# Altium PCB 固定翼.PcbDoc
Units mil, origin at the board's own origin, x right, y up, seen from the top; angles counter-clockwise.
Board outline 2120.03 x 1290.08 mil, 2 copper layers (Top Layer, Bottom Layer); 67 components, 57 nets, 316 pads, 63 vias.
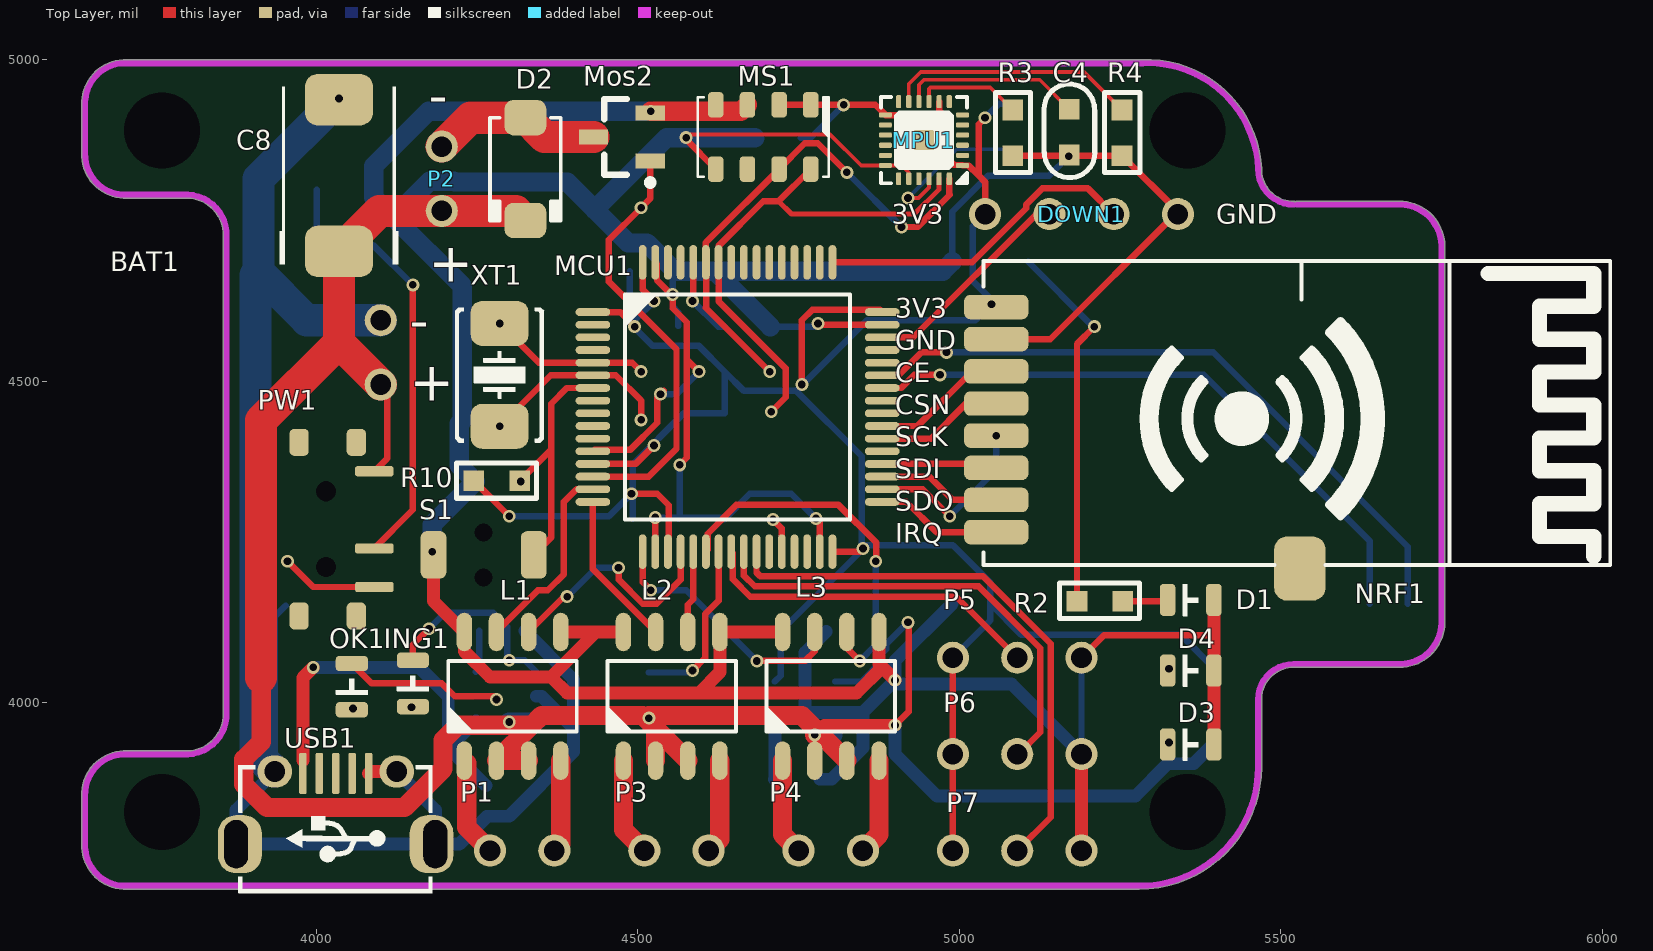
[diagram p0: Top Layer view]
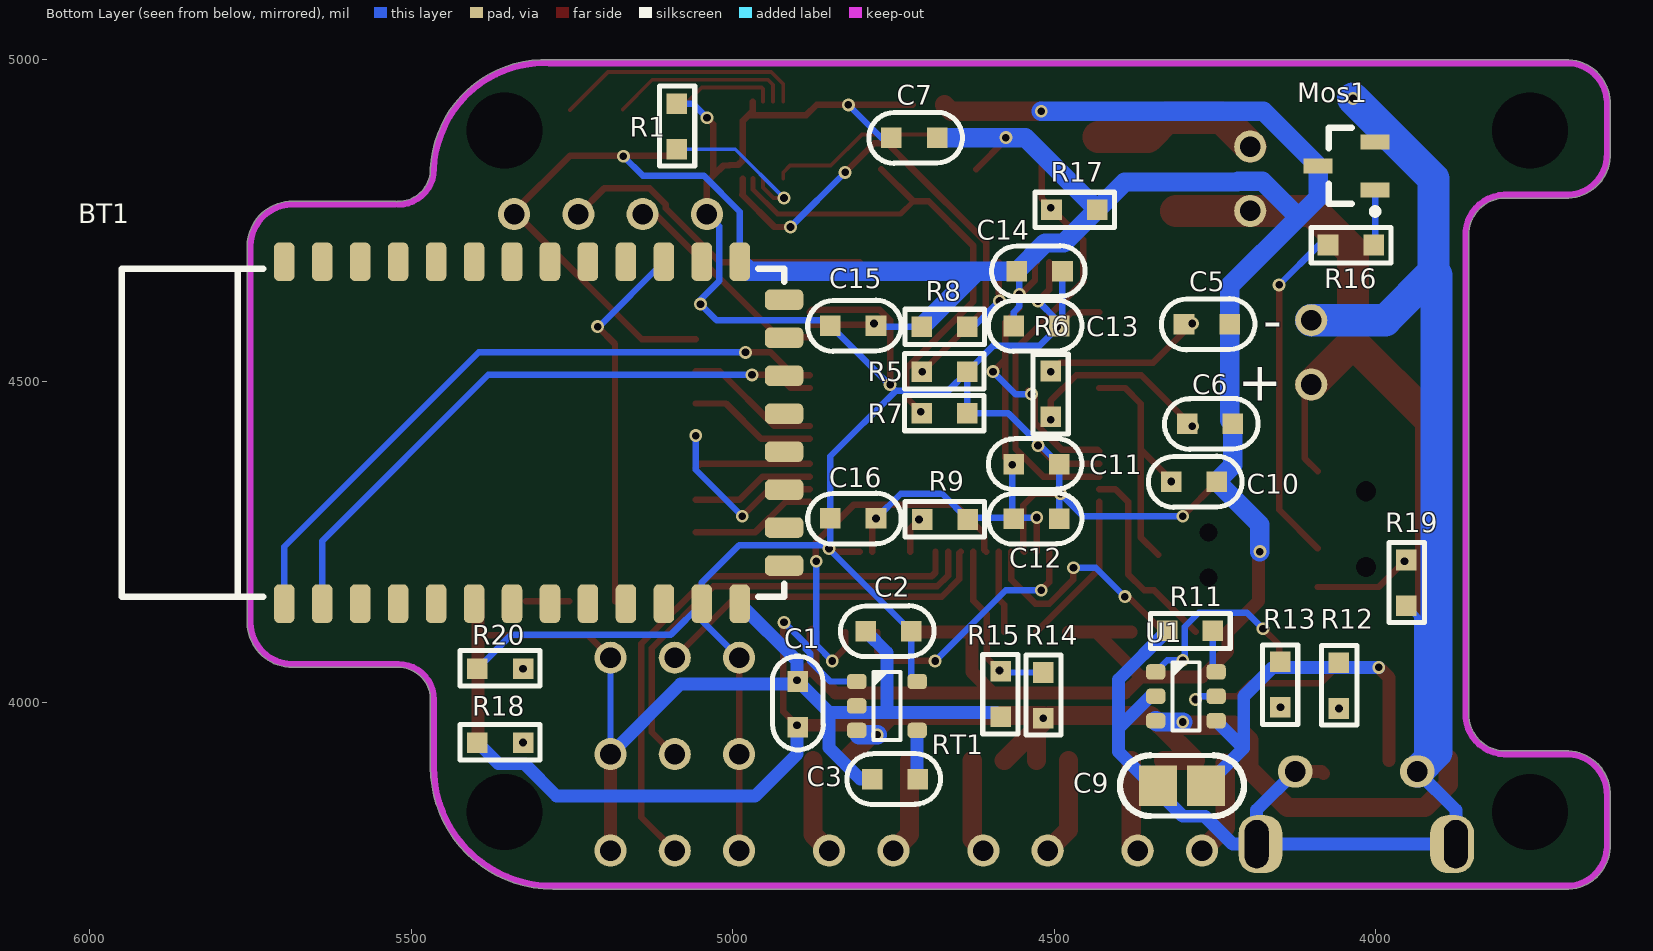
[diagram p1: Bottom Layer view, seen from below]
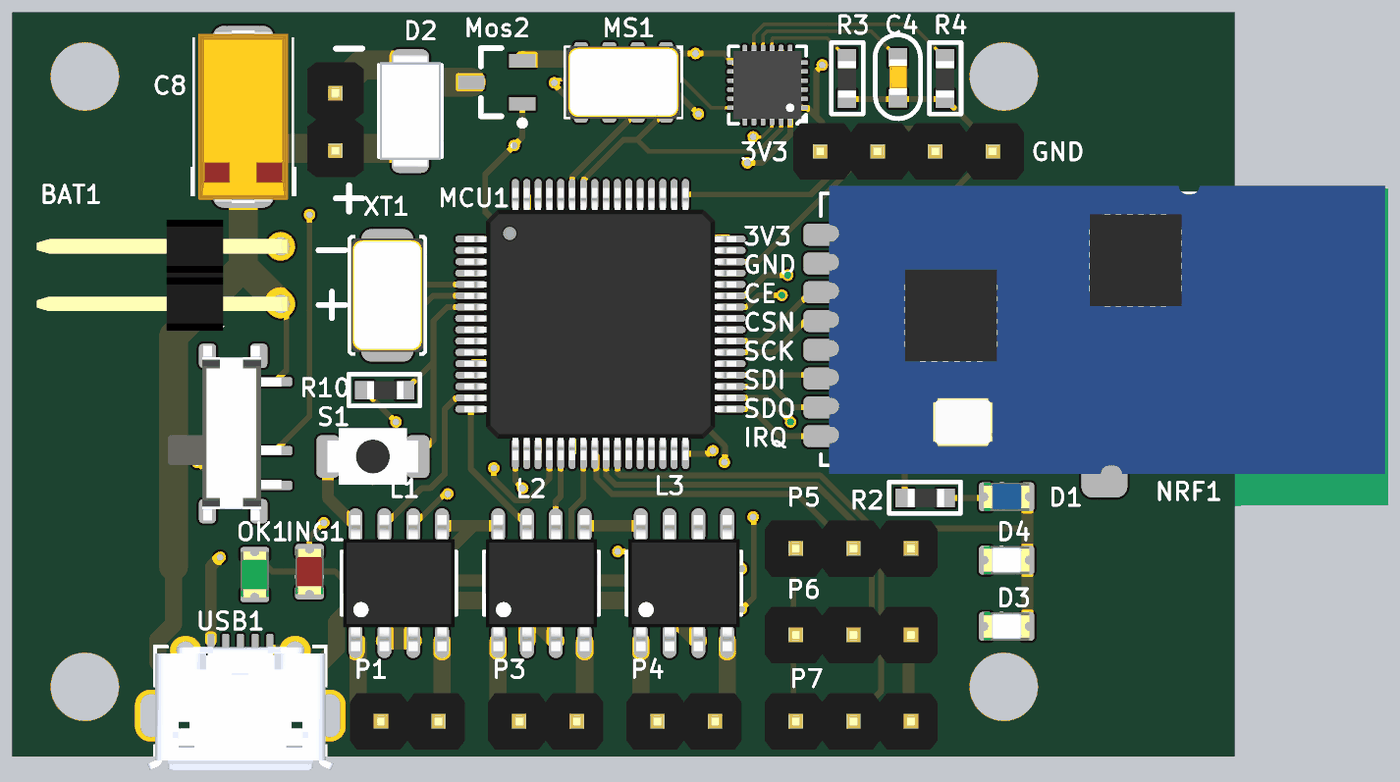
[diagram p2: 3D render of the assembled board from above, using the file's embedded part models]
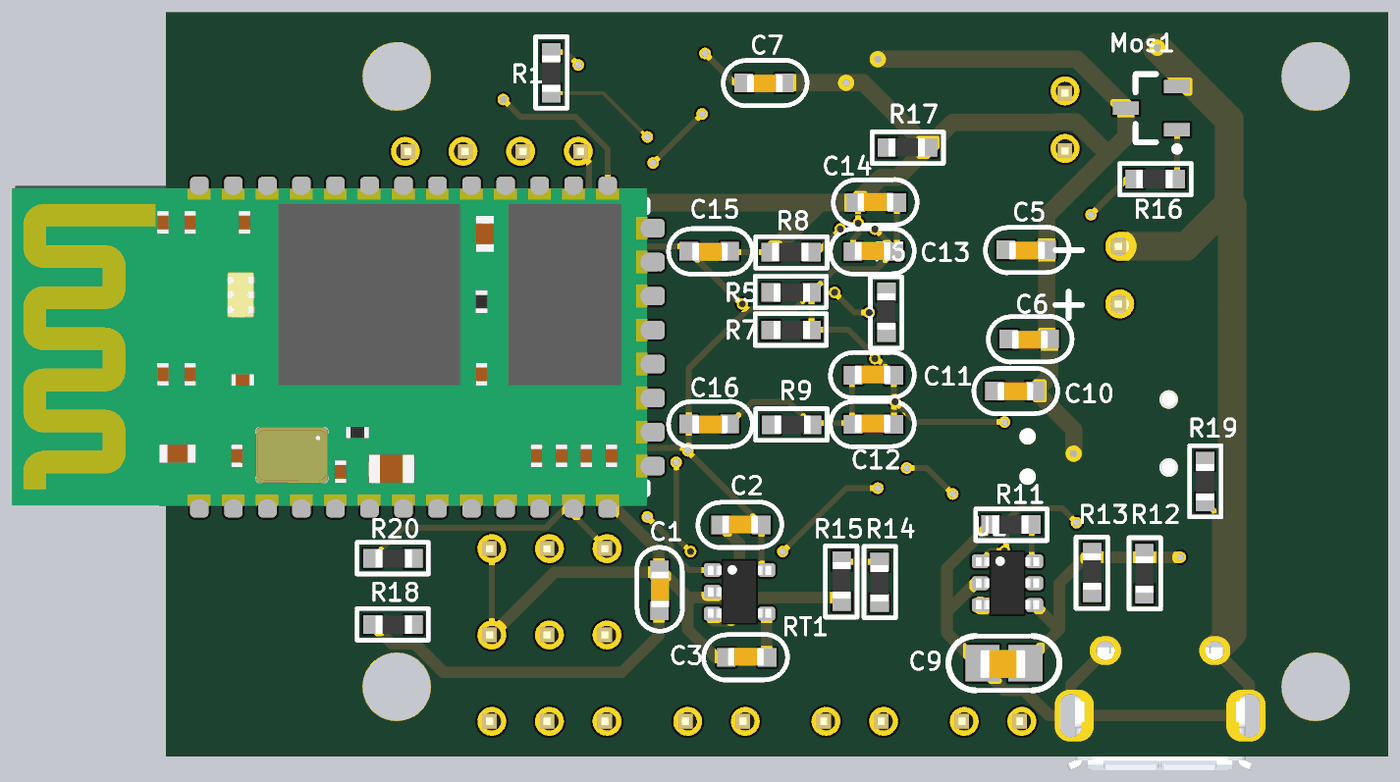
[diagram p3: 3D render of the assembled board from below, using the file's embedded part models]

## Layer stack, top to bottom
Top Layer: signal copper 1.4
Dielectric: dielectric 12.6, FR-4, Dk 4.8
Bottom Layer: signal copper 1.4

## Board outline
3634.99,3774.8 cw(c3640,3775) 3634.99,3775 3634.99,3854.9 cw(c3702.5,3857.5) 3699.8,3925.01 cw(c3700,3920) 3700,3925.01 3799.9,3925.01 ccw(c3797.5,3982.5) 3855.03,3982.5 ccw(c3797.5,3982.5) 3854.99,3984.77 ccw(c3797.5,3982.5) 3854.99,3984.8 3854.99,3984.77 cw(c3860,3985) 3854.99,3985 3854.99,4725 cw(c3860,4725) 3854.99,4725.23 ccw(c3797.5,4727.5) 3855.03,4727.5 ccw(c3797.5,4727.5) 3799.9,4784.98 3700,4784.98 cw(c3700,4790) 3699.8,4784.99 cw(c3702.5,4852.5) 3634.99,4855.1 3634.99,4935 cw(c3640,4935) 3634.99,4935.2 cw(c3702.5,4932.5) 3705.1,5000.02 5284.89,5000.02 cw(c5292.5,4822.5) 5470.01,4830.22 cw(c5465,4830) 5470.02,4830 ccw(c5520,4830) 5520,4780.02 cw(c5520,4775) 5522.5,4779.35 cw(c5525,4775) 5525,4780.02 5685,4780.02 ccw(c5685,4775) 5684.97,4780.02 5685,4780.02 cw(c5685,4710) 5755.02,4710 5755.02,4125 ccw(c5750,4125) 5755.02,4125.03 5755.02,4125 cw(c5685,4125) 5685,4054.99 5520,4054.99 ccw(c5520,4005) 5470.02,4005 5470.02,3900 cw(c5465,3900) 5470.01,3899.97 ccw(c5280,3900) 5470.01,3900 5470.01,3899.97 cw(c5280,3900) 5280,3709.99 3705.1,3709.99 cw(c3702.5,3777.5)

## Design rules (kind name [scope] priority, off if disabled: settings)
Clearance [All] p1: gap=6
PolygonConnect [All] p1: connectstyle=Relief reliefconductorwidth=10 reliefentries=4 polygonreliefangle="90 Angle" airgapwidth=10
RoutingVias [All] p1: holewidth=28 width=50 viastyle="Through Hole" minholewidth=28 minwidth=50 maxholewidth=28 maxwidth=50
SolderMaskExpansion [All] p1: expansion=4
Width [All] p1: maxlimit=100 minlimit=6 preferedwidth=10 minimp=50.000000 maximp=50.000000 favimp=50.000000
28 further rules are at their usual default settings.

## Classes and differential pairs
component class 接口: BAT1 D2 D3 D4 DOWN1 L1 L2 L3 Mos1 Mos2 P1 P2 P3 P4 P5 P6 P7 PW1 R16 R17 R18 R19 R20 USB1
component class 固定翼: BT1 C1 C2 C3 C4 C5 C6 C7 C8 C9 C10 C11 C12 C13 C14 C15 C16 D1 ING1 MCU1 MPU1 MS1 NRF1 OK1 R1 R2 R3 R4 R5 R6 R7 R8 R9 R10 R11 R12 R13 R14 R15 RT1 S1 U1 XT1

## Components (designator, comment, footprint, x,y, rotation, side; value= is the part's Value field where it differs from the comment)
BAT1 "HDR1x2_2.54" HDR1X2_2.54_90 4100,4495 r180 top
BT1 "Bluetooth_HC05" Bluetooth_HC05 4920,4420 r90 bottom
C1 "Cap_0603" CAP_0603 4900,4000 r270 bottom
C2 "Cap_0603" CAP_0603 4760,4110 r180 bottom
C3 "Cap_0603" CAP_0603 4750,3880 r180 bottom
C4 "Cap_0603" CAP_0603 5170,4890 r270 top
C5 "Cap_0603" CAP_0603 4260,4590 r0 bottom
C6 "Cap_0603" CAP_0603 4255,4435 r0 bottom
C7 "Cap_0603" CAP_0603 4715,4880 r0 bottom
C8 "Cap_Tan_2917" CAP_TAN_D2917 4035,4820 r90 top
C9 "Cap_0805" CAP_0805 4300,3870 r180 bottom
C10 "Cap_0603" CAP_0603 4280,4345 r0 bottom
C11 "Cap_0603" CAP_0603 4530,4370 r180 bottom
C12 "Cap_0603" CAP_0603 4530,4285 r180 bottom
C13 "Cap_0603" CAP_0603 4530,4585 r180 bottom
C14 "Cap_0603" CAP_0603 4525,4670 r180 bottom
C15 "Cap_0603" CAP_0603 4810,4587.63 r0 bottom
C16 "Cap_0603" CAP_0603 4810,4287.63 r0 bottom
D1 "LED_0805" LED_0805_BLUE 5360,4160 r0 top
D2 "Diode_SMA" DO-214AC 4325,4830 r270 top
D3 "LED_0805" LED_0805_YELLOW 5360,3935 r0 top
D4 "LED_0805" LED_0805_YELLOW 5360,4050 r0 top
DOWN1 "HDR1x4_2.54" HDR1X4_2.54_180 5040,4760 r90 top
ING1 "LED_0805" LED_0805_RED 4150,4030 r90 top
L1 "L9110" SOP_E150_8 4305,4010 r90 top
L2 "L9110" SOP_E150_8 4552.5,4010 r90 top
L3 "L9110" SOP_E150_8 4800,4010 r90 top
MCU1 "STM32F103RC" LQFP_P0.5_64 4655,4460 r0 top
Mos1 "MOSFET N" Nmos_SOT23 4045,4835 r0 bottom
Mos2 "MOSFET N" Nmos_SOT23 4475,4880 r180 top
MPU1 "MPU9250" QFN_P0.4_24 4945,4875 r180 top
MS1 "MS5611" OTHER_MS5611_8 4695,4880 r270 top
NRF1 "NRF2401_优信" nrf24l01_youxin 5435,4435 r0 top
OK1 "LED_0805" LED_0805_GREEN 4055,4025 r90 top
P1 "HDR1x2_2.54" HDR1X2_2.54_180 4370,3770 r270 top
P2 "HDR1x2_2.54" HDR1X2_2.54_180 4195,4765 r180 top
P3 "HDR1x2_2.54" HDR1X2_2.54_180 4610,3770 r270 top
P4 "HDR1x2_2.54" HDR1X2_2.54_180 4850,3770 r270 top
P5 "HDR1x3_2.54" HDR1X3_2.54_180 4990,4070 r90 top
P6 "HDR1x3_2.54" HDR1X3_2.54_180 4990,3920 r90 top
P7 "HDR1x3_2.54" HDR1X3_2.54_180 4990,3770 r90 top
PW1 "SwitchSPDT_2.8x6.6_90" SwitchSPDT_2.8X6.6_90 4015,4270 r270 top
R1 "Res_0603" RES_0603 5005,4895 r270 bottom
R2 "Res_0603" RES_0603 5220,4240 r0 top
R3 "Res_0603" RES_0603 5165,4885 r270 top
R4 "Res_0603" RES_0603 5335,4885 r270 top
R5 "Res_0603" RES_0603 4669,4597 r180 bottom
R6 "Res_0603" RES_0603 4587,4482 r90 bottom
R7 "Res_0603" RES_0603 4669,4532 r180 bottom
R8 "Res_0603" RES_0603 4672,4503 r0 bottom
R9 "Res_0603" RES_0603 4668,4367 r180 bottom
R10 "Res_0603" RES_0603 4282,4427 r0 top
R11 "Res_0603" RES_0603 4290,4030 r0 bottom
R12 "Res_0603" RES_0603 3975,4025 r270 bottom
R13 "Res_0603" RES_0603 4230,4030 r90 bottom
R14 "Res_0603" RES_0603 4435,4010 r270 bottom
R15 "Res_0603" RES_0603 4665,4015 r90 bottom
R16 "Res_0603" RES_0603 4040,4630 r0 bottom
R17 "Res_0603" RES_0603 4470,4685 r0 bottom
R18 "Res_0603" RES_0603 5360,4020 r180 bottom
R19 "Res_0603" RES_0603 3870,4185 r270 bottom
R20 "Res_0603" RES_0603 5360,4135 r180 bottom
RT1 "RT9193" SOT23-5 4760,3995 r180 bottom
S1 "ButtonTACT_3x4x2_180" ButtonTACT_3x4x2_180H 4260,4230 r180 top
U1 "TP4059" SOT23-6 4295,4010 r180 bottom
USB1 "USB_Micro" USB_Micro-AB 4030,3790 r180 top
XT1 "XTAL_5032_2P" XT_5032_2 4285,4510 r90 top

## Footprints (in the part's own frame and the unit in brackets; to place one, negate y for a bottom-side part, rotate by r counter-clockwise, add the part's x,y. Pads: shape width x height; smd on the part's side, far side on the other; paste and mask are expansions set on the pad)
Bluetooth_HC05 [mil]
  rrect50% 60x32 smd: 1(-265.91,777.56) 2(-265.91,718.5) 3(-265.91,659.45) 4(-265.91,600.39) 5(-265.91,541.34) 6(-265.91,482.28) 7(-265.91,423.23) 8(-265.91,364.17) 9(-265.91,305.12) 10(-265.91,246.06) 11(-265.91,187.01) 12(-265.91,127.95) 13(-265.91,68.9) 22(265.91,68.9) 23(265.91,127.95) 24(265.91,187.01) 25(265.91,246.06) 26(265.91,305.12) 27(265.91,364.17) 28(265.91,423.23) 29(265.91,482.28) 30(265.91,541.34) 31(265.91,600.39) 32(265.91,659.45) 33(265.91,718.5) 34(265.91,777.56)
  rrect50% 32x60 smd: 14(-206.69,0) 15(-147.64,0) 16(-88.58,0) 17(-29.53,0) 18(29.53,0) 19(88.58,0) 20(147.64,0) 21(206.69,0)
  silkscreen extent -255,0 255,1030, body extent -276,0 276,1103, height 93
ButtonTACT_3x4x2_180H [mil]
  round 0 hole 28: 0(0,35) 0(0,-35)
  rrect50% 40x74 smd: 1(-78,0) 2(78,0)
  body extent -79,-49 79,49, height 63
CAP_0603 [mil]
  rect 32x32 smd: 1(-33,1) 2(38,1)
  silkscreen extent -72,-38 73,41, body extent -30,-14 33,18, height 31
CAP_0805 [mm]
  rect 1.5x1.6 smd: 1(-0.977,0.025) 2(0.923,0.025)
  silkscreen extent -2.48,-1.17 2.42,1.23, body extent -1.08,-0.63 0.92,0.62, height 1
CAP_TAN_D2917 [mil]
  rrect50% 80x106 smd: 1(-118,0) 2(118,0)
  silkscreen extent -138,-92 138,92, body extent -150,-78 150,78, height 122
DO-214AC [mil] "SMA"
  rrect50% 55x65 smd: 1(-80,0) 2(80,0)
  silkscreen extent -80,-55 80,55, body extent -98,-53 98,53, height 85
HDR1X2_2.54_90 [mil]
  round 50 hole 32: 1(0,0) 2(0,-100)
  body extent -15,-146 424,46, height 99
HDR1X2_2.54_180 [mil]
  round 50 hole 32: 1(0,0) 2(0,-100)
  body extent -49,-150 49,50, height 323
HDR1X3_2.54_180 [mil]
  round 50 hole 32: 1(0,0) 2(0,-100) 3(0,-200)
  body extent -49,-250 49,50, height 323
HDR1X4_2.54_180 [mil]
  round 50 hole 32: 1(0,0) 2(0,-100) 3(0,-200) 4(0,-300)
  body extent -49,-350 49,50, height 323
LED_0805_BLUE [mil]
  rrect50% 24x50 smd: 1(-36,0) 2(36,0)
  silkscreen extent -12,-24 12,24, body extent -40,-25 40,25, height 43
LED_0805_GREEN [mil]
  rrect50% 24x50 smd: 1(-36,0) 2(36,0)
  silkscreen extent -12,-24 12,24, body extent -40,-25 40,25, height 43
LED_0805_RED [mil]
  rrect50% 24x50 smd: 1(-36,0) 2(36,0)
  silkscreen extent -12,-24 12,24, body extent -40,-25 40,25, height 43
LED_0805_YELLOW [mil]
  rrect50% 24x50 smd: 1(-36,0) 2(36,0)
  silkscreen extent -12,-24 12,24, body extent -40,-25 40,25, height 43
LQFP_P0.5_64 [mil]
  oval 54x12 smd: 1(-225,147.64) 2(-225,127.95) 3(-225,108.27) 4(-225,88.58) 5(-225,68.9) 6(-225,49.21) 7(-225,29.53) 8(-225,9.84) 9(-225,-9.84) 10(-225,-29.53) 11(-225,-49.21) 12(-225,-68.9) 13(-225,-88.58) 14(-225,-108.27) 15(-225,-127.95) 16(-225,-147.64) 33(225,-147.64) 34(225,-127.95) 35(225,-108.27) 36(225,-88.58) 37(225,-68.9) 38(225,-49.21) 39(225,-29.53) 40(225,-9.84) 41(225,9.84) 42(225,29.53) 43(225,49.21) 44(225,68.9) 45(225,88.58) 46(225,108.27) 47(225,127.95) 48(225,147.64)
  oval 12x54 smd: 17(-147.64,-225) 18(-127.95,-225) 19(-108.27,-225) 20(-88.58,-225) 21(-68.9,-225) 22(-49.21,-225) 23(-29.53,-225) 24(-9.84,-225) 25(9.84,-225) 26(29.53,-225) 27(49.21,-225) 28(68.9,-225) 29(88.58,-225) 30(108.27,-225) 31(127.95,-225) 32(147.64,-225) 49(147.64,225) 50(127.95,225) 51(108.27,225) 52(88.58,225) 53(68.9,225) 54(49.21,225) 55(29.53,225) 56(9.84,225) 57(-9.84,225) 58(-29.53,225) 59(-49.21,225) 60(-68.9,225) 61(-88.58,225) 62(-108.27,225) 63(-127.95,225) 64(-147.64,225)
  silkscreen extent -175,-175 175,175, body extent -236,-236 236,236, height 59
Nmos_SOT23 [mm]
  rect 1.15x0.6 smd: D(1.125,0) G(-1.125,0.95) S(-1.125,-0.95)
  silkscreen extent -1.25,-1.5 0.7,1.92, body extent -0.7,-1.5 0.7,1.5, height 1.14
nrf24l01_youxin [mil]
  rrect50% 100x38 smd: 1(-377.57,180.39) 2(-377.57,130.39) 3(-377.57,80.39) 4(-377.57,30.39) 5(-377.57,-19.61) 6(-377.57,-69.61) 7(-377.57,-119.61) 8(-377.57,-169.61)
  rrect50% 80x100 smd: 9(94.68,-226.31)
  silkscreen extent -398,-221 577,252, body extent -383,-235 582,265, height 46
OTHER_MS5611_8 [mil]
  rrect50% 40x24 smd: 1(-50,73.82) 2(-50,24.61) 3(-50,-24.61) 4(-50,-73.82) 5(50,-73.82) 6(50,-24.61) 7(50,24.61) 8(50,73.82)
  silkscreen extent -62,-102 62,102, body extent -63,-98 63,98, height 39
QFN_P0.4_24 [mil]
  rrect50% 20x8 smd: 1(-60,39.37) 2(-60,23.62) 3(-60,7.87) 4(-60,-7.87) 5(-60,-23.62) 6(-60,-39.37) 13(60,-39.37) 14(60,-23.62) 15(60,-7.87) 16(60,7.87) 17(60,23.62) 18(60,39.37)
  rrect50% 8x20 smd: 7(-39.37,-60) 8(-23.62,-60) 9(-7.87,-60) 10(7.87,-60) 11(23.62,-60) 12(39.37,-60) 19(39.37,60) 20(23.62,60) 21(7.87,60) 22(-7.87,60) 23(-23.62,60) 24(-39.37,60)
  rrect20% 45x45 smd: 25(0,0)
  silkscreen extent -67,-67 67,67, body extent -60,-60 60,60, height 39
RES_0603 [mil]
  rect 32x32 smd: 1(-37,-82) 2(34,-82)
  silkscreen extent -64,-109 60,-54, body extent -31,-98 31,-66, height 18
SOP_E150_8 [mil]
  oval 60x24 smd: 1(-100,75) 2(-100,25) 3(-100,-25) 4(-100,-75) 5(100,-75) 6(100,-25) 7(100,25) 8(100,75)
  silkscreen extent -55,-100 55,100, body extent -118,-96 118,96, height 69
SOT23-5 [mil]
  rrect50% 30x24 smd: 1(-47,38) 2(-47,0) 3(-47,-38) 4(47,-38) 5(47,38)
  silkscreen extent -21,-53 21,53, body extent -55,-57 55,57, height 57
SOT23-6 [mil]
  rrect50% 30x24 smd: 1(-47,38) 2(-47,0) 3(-47,-38) 4(47,-38) 5(47,0) 6(47,38)
  silkscreen extent -21,-53 21,53, body extent -55,-57 55,57, height 57
SwitchSPDT_2.8X6.6_90 [mil]
  rrect50% 42x30 smd: 0(-135,-42) 0(-135,47) 0(135,-42) 0(135,47)
  round 10 hole 31.5: 0(-59.06,0) 0(59.06,0)
  rrect50% 16x60 smd: 1(90,75) 2(30,75) 3(-90,75)
  body extent -152,-111 151,86, height 55
USB_Micro-AB [mil]
  rrect80% 68x90 hole 37 slot 75 at 90 deg copper offset 6,0 mask+0: 0(-155,10)
  oval 54x50 hole 32 mask+0: 0(-95,-103) 0(95,-103)
  rrect80% 68x90 hole 37 slot 75 at 90 deg copper offset -6,0 mask+0: 0(155,10)
  rrect50% 12x64 smd: 1(51.18,-100) 2(25.59,-100) 3(0,-100) 4(-25.59,-100) 5(-51.18,-100)
  silkscreen extent -150,-113 150,86, body extent -161,-109 161,104, height 108
XT_5032_2 [mil]
  rrect50% 70x90 smd: 1(-80,0) 2(80,0)
  silkscreen extent -104,-68 104,68, body extent -98,-63 98,63, height 39

## Part data
BAT1 DOWN1 P1 P3 P4: "Header"
BT1: "Module"
C1 C2 C3 C4 C5 C6 C7 C8 C9 C10 C11 C12 C13 C14 C15 C16: "Capacitor"
D1 D3 D4 ING1 OK1: "LED"
D2: "Diode"
MCU1: "MCU"
Mos1 Mos2: "MOS SOT23"
MS1: "Sensor"
P2: library part HDR1x2_2.54T, "Header"
P5 P6 P7: library part HDR1x3_2.54T, "Header"
PW1: "Switch"
R1 R2 R3 R4 R5 R6 R7 R8 R9 R10 R11 R12 R13 R14 R15 R16 R17 R18 R19 R20: "Resistor"
RT1: "Power"
S1: "Button"
USB1: "USB"
XT1: "Crystal Oscillator"

## Free pads (board coordinates)
  round 30 hole 118.11: 0(3760,3830) 0(3760,4890) 0(5355,3830) 0(5355,4890)

## Via types
v1: diameter 20, hole 12, Top Layer to Bottom Layer, 63 vias

## Nets (pads, with @x,y where several pads share a name; then routed paths per layer and width w, separated by ;. In a path a pad name is that pad's centre, name@x,y a point inside that pad or via, vN(x,y) a via of type N, cw(c..) or ccw(c..) an arc to the next point about the centre after c; other vN are vias at no path point)
3V3: BT1.12 C2.2 C7.2 C11.2 C12.2 C13.2 C14.2 C15.2 C16.2 DOWN1.1 MCU1.1 MCU1.13 MCU1.19 MCU1.32 MCU1.48 MCU1.64 MPU1.1 MPU1.8 MPU1.13 MS1.1 MS1.2 NRF1.1 P5.1 P6.1 P7.1 R1.1 R5.2 R7.2 R10.1 R20.1 RT1.5 | length 4558.7
  Top Layer w10: R10.1 v1(4300,4290) ; MCU1.13 4496.42,4371.42 v1(4525,4400) ; MCU1.1 4472.36,4607.64 v1(4495,4585) ; v1(4490,4325) 4530,4325 4548.05,4306.95 4548.05,4236.31 MCU1.19 ; MCU1.64 4507.36,4642.64 v1(4525,4625) ; MS1.2 MS1.1 4869.37,4930 MPU1.13 4885.37,4914 4973,4914 4974,4915 ; v1(4755,4495) 4755,4595 4771,4611 4876.64,4611 MCU1.48 ; MCU1.32 4845,4235 v1(4850,4240) ; MPU1.8 4968.62,4920.38 4974,4915 ; P7.1 P6.1 P5.1 ; DOWN1.1 5040,4810 5030,4820 ; v1(5040,4910) 5030,4900 5030,4820 ; 4974,4915 4984,4905 4984,4843.99 4991.62,4836.38 5004.25,4836.38 MPU1.1 5014.37,4835.63 5030,4820
  Bottom Layer w10: v1(4300,4290) 4455,4290 v1(4490,4325) ; C14.2 4487,4591 C13.2 4523,4555 4595,4555 R5.2 ; C12.2 C11.2 4571,4450 R7.2 R5.2 ; v1(4495,4585) 4495,4595 v1(4525,4625) ; RT1.5 4722,4042 C2.2 v1@4848,4237 ; C7.2 4769,4879 v1(4820,4930) ; P5.1 5047.95,4127.95 BT1.12 ; DOWN1.1 5020.95,4740.95 5020.95,4656.04 5050,4626.99 v1(5050,4620) 5025,4595 4856.37,4595 C15.2 4746.37,4485 ; v1(5040,4910) 5062,4932 R1.1 ; R20.1 5344,4106 5096.05,4106 BT1.12 ; R5.2 4665,4485 4746.37,4485 ; 4746.37,4485 4848,4383.37 C16.2 v1@4848,4237 ; v1@4848,4237 4856,4245 4990,4245 5047.95,4187.05 BT1.12
ADC1: MCU1.23 R14.1 R15.2 | length 267.2
  Top Layer w10: v1(4585,4050) 4605,4070 4605,4081.47 4604.5,4081.97 4604.5,4137.53 4625.47,4158.5 MCU1.23
  Bottom Layer w10: R14.1 R15.2@4582,4047
ADC2: MCU1.24 P5.2 | length 536.7
  Top Layer w10: MCU1.24 4647.84,4232.31 4647.84,4192.16 4675,4165 4995,4165 P5.2
ADC3: MCU1.25 P6.2 | length 726.1
  Top Layer w10: MCU1.25 4664.84,4197.78 4681.63,4181 5029.91,4181 5126,4084.91 5126,3954 5092,3920 P6.2
ADC4: MCU1.26 P7.2 | length 879
  Top Layer w10: MCU1.26 4684.53,4202.47 4690,4197 5036.54,4197 5142,4091.54 5142,3822 P7.2
BGND: BAT1.2 C8.2 C9.1 Mos1.S R11.2 R19.2 U1.2 USB1.0 USB1.5 | length 2783.2
  Top Layer w20: USB1.5 4084.18,3893 USB1.0@4125,3893
  Bottom Layer w10: USB1.0@3935,3913 3935,4134 R19.2
  Bottom Layer w20: USB1.0@3935,3893 3875,3833 3875,3780 USB1.0@4185,3780 ; USB1.0@4125,3893 4185,3833 USB1.0@4185,3780 ; R11.2 4324.11,4112 4400,4036.11 4400,3960.11 ; U1.2 4350.11,4010 4400,3960.11 ; USB1.0@4185,3780 4222.02,3780 4265.51,3823.49 4299.81,3823.49 4400,3923.68 4400,3960.11
  Bottom Layer w50: USB1.0@3935,3893 3905,3923 3905,4665 3910,4670 ; v1(4035,4940) 3910,4815 3910,4670 ; BAT1.2 3985,4595 3910,4670
BOOT0: MCU1.60 R8.1 | length 115.5
  Top Layer w10: 4586.1,4636.1 MCU1.60
  Bottom Layer w10: v1(4585,4625) 4625,4585 R8.1
BOOT1: MCU1.28 R9.1 | length 55.8
  Top Layer w10: v1(4710,4285) 4723.9,4271.1 MCU1.28
CE: MCU1.39 NRF1.3 | length 212.6
  Top Layer w10: MCU1.39 4935,4430.47 5019.92,4515.39 NRF1.3
CSN: MCU1.38 NRF1.4 | length 200
  Top Layer w10: MCU1.38 4955.79,4410.79 5010.39,4465.39 NRF1.4
GND: BT1.13 BT1.22 C1.1 C2.1 C3.1 C4.2 C5.1 C6.1 C7.1 C10.1 C11.1 C12.1 C13.1 C14.1 C15.1 C16.1 D1.2 D3.2 D4.2 DOWN1.4 L1.5 L1.8 L2.5 L2.8 L3.5 L3.8 MCU1.12 MCU1.18 MCU1.31 MCU1.47 MCU1.63 Mos1.D Mos2.S MPU1.18 MPU1.20 MS1.3 MS1.4 MS1.5 NRF1.2 P5.3 P6.3 P7.3 R3.2 R4.2 R8.2 R9.2 R15.1 R17.1 RT1.2 S1.2 | length 8647.3
  Top Layer w6: v1(4575,4879) 4580,4884 4799,4884 4847.37,4835.63 MPU1.18 4910.56,4835.63 4921.38,4824.81 MPU1.20
  Top Layer w10: MCU1.12 4432.69,4393.79 4488.49,4393.79 4530,4435.3 4530,4475 v1(4535,4480) v1@4540,4485 ; v1@4525,4290 v1(4527.05,4287.95) MCU1.18 ; MCU1.63 4529.73,4682.31 4529.73,4656.96 4551.69,4635 v1(4554,4635) 4554,4613.63 4576,4591.63 4576,4534 ; v1(4565,4370) 4576,4381 4576,4534 ; v1(4575,4879) 4575,4876.18 MS1.5 ; v1(4595,4515) 4576,4534 ; v1(4780,4590) 4782.05,4587.95 MCU1.47 ; MCU1.31 v1@4782.95,4280.68 ; NRF1.2 5141.39,4565.39 5340,4764 R4.2 R3.2 ; P5.3 5225,4105 5396,4105
  Top Layer w20: S1.2 4182,4158 L1.8 4230,4080 4270,4040 4365,4040 ; L1.5 4435,4110 ; L2.8 4435,4110 ; L3.8 L2.5 4627.5,4047.5 4595,4015 ; 4875,4060 L3.5 ; v1(4900,4035) 4880,4055 4840,4015 4595,4015 ; P7.3 P6.3 ; D3.2 D4.2 5396,4105 D1.2 ; 4365,4040 4390,4015 4595,4015 ; 4365,4040 4435,4110
  Top Layer w30: v1(4520,4920) 4660.39,4920 MS1.3
  Bottom Layer w10: v1(4527.05,4287.95) C12.1@4564.95,4287.95 ; v1(4535,4480) 4560,4480 v1(4595,4515) ; C14.1 4554,4667 v1(4554,4635) 4554,4616.3 4563,4607.3 C13.1 ; C12.1 C12.1@4564.95,4287.95 ; v1(4565,4370) 4565,4288 C12.1@4564.95,4287.95 ; R8.2 4775,4585 v1(4780,4590) ; v1(4777,4286.63) 4738.63,4325 4674,4325 R9.2 4631.05,4287.95 C12.1@4564.95,4287.95 ; BT1.22 4988.9,4763.9 5045,4820 5140,4820 v1(5170,4850) ; P6.3 P5.3
  Bottom Layer w20: R15.1 4590,3985 4760,3985 ; C3.1 4801,3881 4850,3930 4850,3985 ; C2.1 4760,4078 4760,3985 ; BT1.13 4900,4065.2 v1(4900,4035) ; P6.3 5081,4029 4906,4029 v1(4900,4035) ; 4760,3985 4850,3985 ; 4850,3985 v1(4900,4035)
  Bottom Layer w30: Mos1.D@4089.29,4830 4089.29,4785.71 4120,4755 ; Mos1.D 4174.29,4920 v1(4520,4920) ; v1(4180,4235) 4180,4277 C10.1 4222,4369 C6.1 4227,4439 C5.1 4227,4648 4120,4755 ; C7.1 v1(4575,4879) 4545,4879 R17.1 ; R8.2 4620,4671 ; BT1.22 4973.99,4671 4620,4671 ; 4120,4755 4120,4755.05 4175.95,4811 4214.05,4811 4215.05,4810 4390,4810 R17.1 ; R17.1 4485,4715 4514,4715 C14.1 4620,4671
IO1: L1.6 MCU1.20 | length 371.2
  Top Layer w10: L1.6 4330,4110.53 4384.47,4165 v1(4390,4165) ; v1(4470,4210) 4470,4191.52 4507.52,4154 4529,4154 4566.42,4191.42 MCU1.20
  Bottom Layer w10: v1(4390,4165) 4435,4210 v1(4470,4210)
IO2: L2.6 MCU1.21 | length 128.6
  Top Layer w10: L2.6 4577.5,4152.5 4586.1,4161.1 MCU1.21
IO3: L3.6 MCU1.22 | length 582.3
  Top Layer w10: MCU1.22 4608.47,4237.69 4608.47,4263.04 4653.06,4307.63 4812.07,4307.63 4871,4248.7 4871,4225.15 4870,4224.15 v1(4870,4220) ; L3.6 4825,4085 v1(4845,4065)
  Bottom Layer w10: v1(4845,4065) 4870,4090 v1(4870,4220)
IRQ: MCU1.33 NRF1.8 | length 196.9
  Top Layer w10: MCU1.33 4917.64,4312.36 4964.61,4265.39 NRF1.8
MISO: MCU1.35 NRF1.7 | length 192.5
  Top Layer w10: MCU1.35 4953.27,4351.73 4989.61,4315.39 NRF1.7
MOSI: MCU1.36 NRF1.6 | length 179.9
  Top Layer w10: MCU1.36 5051.4,4371.42 NRF1.6
NetBT1_24: BT1.24 R2.1 | length 583
  Top Layer w10: R2.1 5183,4558 v1(5210,4585)
  Bottom Layer w10: BT1.24 5207.91,4585 v1(5210,4585)
NetC3_2: C3.2 RT1.4 | length 76.4
  Bottom Layer w20: C3.2 4713,3882 RT1.4
NetC4_1: C4.1 MPU1.10 | length 282.3
  Top Layer w6: MPU1.10 4937.13,4961.16 4944.97,4969 5125,4969 C4.1
NetC5_2: C5.2 MCU1.5 R6.2 XT1.2 | length 251.1
  Top Layer w10: v1(4285,4590) 4346.1,4528.9 MCU1.5 4491.1,4528.9 v1(4505,4515)
NetC6_2: C6.2 MCU1.6 R6.1 XT1.1 | length 299.1
  Top Layer w10: v1(4285,4430) 4364.21,4509.21 MCU1.6 4465.79,4509.21 4505,4470 v1(4505,4440)
NetD1_1: D1.1 R2.2 | length 68
  Top Layer w10: R2.2 D1.1@5322,4158
NetD2_1: D2.1 Mos2.D P2.2 | length 266.8
  Top Layer w50: P2.2 4240,4910 D2.1 4355,4880 Mos2.D
NetD3_1: D3.1 R18.2
  other v1: 5326,3938
NetD4_1: D4.1 R20.2
  other v1: 5326,4053
NetING1_1: ING1.1 R13.1
  other v1: 4148,3993
NetING1_2: ING1.2 U1.1 | length 303.5
  Top Layer w10: ING1.2 4150,4090 v1(4175,4115)
  Bottom Layer w10: v1(4175,4115) 4200,4140 4275,4140 4297,4118 4297,4069 v1(4300,4066) 4324,4066 U1.1
NetL1_1: L1.1 P1.2 | length 150.9
  Top Layer w30: L1.1@4234,3906 4234,3806 P1.2
NetL1_4: L1.4 P1.1 | length 130
  Top Layer w30: P1.1@4380,3780 L1.4
NetL2_1: L2.1 P3.2 | length 153.5
  Top Layer w30: L2.1 4477.5,3802.5 P3.2
NetL2_4: L2.4 P3.1 | length 147.2
  Top Layer w30: P3.1 4627.5,3787.5 L2.4
NetL3_1: L3.1 P4.2 | length 150.4
  Top Layer w30: L3.1 4725,3795 P4.2
NetL3_4: L3.4 P4.1 | length 150.4
  Top Layer w30: P4.1 4875,3795 L3.4
NetMos1_G: Mos1.G R16.1 | length 83.3
  Bottom Layer w10: R16.1@4000.71,4714.29 Mos1.G
NetMPU1_9: MPU1.9 R3.1 | length 165.4
  Top Layer w6: MPU1.9 4952.87,4954.87 4955,4957 5048,4957 R3.1
NetMPU1_11: MPU1.11 R4.1 | length 391.2
  Top Layer w6: MPU1.11 4921.38,4962.38 4940,4981 5194,4981 R4.1
NetMPU1_22: MPU1.22 R1.2 | length 251.8
  Top Layer w6: v1(4920,4785) 4936.62,4785 4952.87,4801.26 MPU1.22
  Bottom Layer w6: v1(4920,4785) 4996,4861 R1.2
NetOK1_1: OK1.1 R12.2
  other v1: 4057,3991
NetPW1_1: PW1.1 R19.1 | length 151.6
  Top Layer w10: v1(3955,4220) 3995,4180 PW1.1
NetR11_1: R11.1 U1.6 | length 66.1
  Bottom Layer w10: U1.6 4253,4053 R11.1
NRST: C10.2 MCU1.7 R10.2 S1.1 | length 390.6
  Top Layer w10: R10.2 4365,4394 ; S1.1 4365,4257 4365,4394 ; MCU1.7 4389.53,4489.53 4365,4465 4365,4394
  other v1: 4318,4344
RXD: BT1.1 MCU1.43 | length 1046.1
  Top Layer w10: MCU1.43 4905.36,4509.21 4941.14,4545 v1(4980,4545)
  Bottom Layer w10: v1(4980,4545) 5395,4545 5697.56,4242.44 BT1.1
SCL: MCU1.58 MPU1.23 MS1.8 R7.1 | length 793.9
  Top Layer w8: 4718.82,4780 4738.82,4760 4930,4760 4968.62,4798.62 MPU1.23
  Top Layer w10: v1(4707.5,4452.5) 4730,4475 4730,4520 4625.47,4624.53 MCU1.58 4625.47,4710.47 4695,4780 4718.82,4780 MS1.8
SCLK: MCU1.34 NRF1.5 | length 277.8
  Top Layer w10: MCU1.34 4942.95,4332.05 v1(4985,4290)
  Bottom Layer w10: v1(4985,4290) 5057.43,4362.43 v1(5057.43,4415.39)
SDA: MCU1.59 MPU1.24 MS1.7 R5.1 | length 792.6
  Top Layer w10: 4605.79,4614.21 v1(4705,4515) ; 4606,4616.3 4606,4684.79 MCU1.59 4605.79,4715.79 MS1.7@4727.3,4837.3 ; MS1.7 4759.61,4870 4780,4870 v1(4825,4825) ; v1(4910,4740) 4935,4740 4985,4790 ; 4984.37,4790.63 MPU1.24
  Bottom Layer w10: v1(4825,4825) v1(4910,4740)
STDBY: OK1.2 U1.5 | length 288.1
  Top Layer w10: OK1.2 4086,4030 4195,4030 4215,4010 4280,4010 v1(4280,4005)
  Bottom Layer w10: U1.5 4280,4010 v1(4280,4005)
SWCLK: DOWN1.3 MCU1.49 | length 505
  Top Layer w10: MCU1.49 5020,4685 5104,4769 5104,4774.91 5129.09,4800 5200,4800 DOWN1.3
SWDIO: DOWN1.2 MCU1.46 | length 319.4
  Top Layer w10: MCU1.46 4928.27,4568.27 DOWN1.2@5120,4760
TIM5_CH1: MCU1.14 Mos2.G R17.2 | length 665.6
  Top Layer w10: MCU1.14 4516.73,4351.73 4560,4395 4560,4550 4455,4655 4455,4720 v1(4505,4770) 4519.29,4784.29 Mos2.G
TIM5_CH2: L1.7 MCU1.15 | length 307.6
  Top Layer w10: L1.7@4280,4110.53 4344.47,4175 4360,4175 4385,4200 4385,4312.4 4404.64,4332.05 MCU1.15
TIM5_CH3: L2.7 MCU1.16 | length 242.7
  Top Layer w10: MCU1.16 4430,4208.03 4527.5,4110.53 L2.7
TIM5_CH4: L3.7 MCU1.17 | length 402
  Top Layer w10: MCU1.17 4507.36,4187.64 v1(4520,4175) ; v1(4685,4065) 4760,4065 4775,4080 L3.7
  Bottom Layer w10: v1(4520,4175) 4575,4175 v1(4685,4065)
TXD: BT1.2 MCU1.42 | length 971.5
  Top Layer w10: MCU1.42 4909.53,4489.53 4930,4510 v1(4970,4510)
  Bottom Layer w10: v1(4970,4510) 5380,4510 5638.5,4251.5 BT1.2
VBAT: BAT1.1 C1.2 C8.1 D2.2 L1.2 L1.3 L2.2 L2.3 L3.2 L3.3 P2.1 PW1.3 R14.2 R18.1 RT1.1 RT1.3 U1.3 | length 3891.4
  Top Layer w10: PW1.3 4110,4380 BAT1.1@4110,4485 ; v1(4900,3965) 4921,3986 4921,4124 v1(4920,4125)
  Top Layer w20: v1(4775,3950) 4780,3955 4790,3965 v1(4900,3965)
  Top Layer w30: 3914,4039 3914,3939.05 3887,3912.05 3887,3873 3923,3837 4137,3837 4197,3897 4197,3941.67 4220.33,3965 4335,3965 ; L1.3 L1.2 4335,3965 ; v1@4517,3980 4755,3980 4775,3960 v1(4775,3950) ; L2.2 4527.5,3960 ; L2.3 4527.5,3960 ; v1@4780,3955 L3.3 ; 4335,3965 4350,3980 4507.5,3980 4527.5,3960
  Top Layer w50: 3914,4039 3914,4439 4035,4560 ; BAT1.1 4035,4560 ; D2.2@4310,4765 P2.1 4098,4765 C8.1 4035,4560
  Bottom Layer w10: RT1.1 4848,4033 4879,4064 4879,4076.37 4886,4083.37 4886,4091 v1(4920,4125)
  Bottom Layer w20: v1(4900,3965) 4900,3920 4965,3855 5273.86,3855 5323.91,3905.06 5364.06,3905.06 R18.1
  Bottom Layer w30: v1(4300,3970) 4340,3970 U1.3 ; v1(4775,3950) RT1.3@4803,3950
  other v1: 4517,3976
VIN: PW1.2 R16.2 | length 536.5
  Top Layer w10: PW1.2 4150,4300 v1(4150,4650)
  Bottom Layer w10: R16.2 4088,4712 v1(4150,4650)
VUSB: C9.2 R12.1 R13.2 U1.4 USB1.1 | length 604.2
  Top Layer w20: USB1.1@3978.82,3910 3978.82,4038.82 v1(3995,4055)
  Bottom Layer w20: v1(3995,4055) 4160,4055 4205,4010 4205,3929.64 ; U1.4 4205.64,3929.64 4205,3929.64 ; C9.2 4205,3929.64
pads on no net: BT1.3 BT1.4 BT1.5 BT1.6 BT1.7 BT1.8 BT1.9 BT1.10 BT1.11 BT1.14 BT1.15 BT1.16 BT1.17 BT1.18 BT1.19 BT1.20 BT1.21 BT1.23 BT1.25 BT1.26 BT1.27 BT1.28 BT1.29 BT1.30 BT1.31 BT1.32 BT1.33 BT1.34 MCU1.2 MCU1.3 MCU1.4 MCU1.8 MCU1.9 MCU1.10 MCU1.11 MCU1.27 MCU1.29 MCU1.30 MCU1.37 MCU1.40 MCU1.41 MCU1.44 MCU1.45 MCU1.50 MCU1.51 MCU1.52 MCU1.53 MCU1.54 MCU1.55 MCU1.56 MCU1.57 MCU1.61 MCU1.62 MPU1.2 MPU1.3 MPU1.4 MPU1.5 MPU1.6 MPU1.7 MPU1.12 MPU1.14 MPU1.15 MPU1.16 MPU1.17 MPU1.19 MPU1.21 MPU1.25 MS1.6 NRF1.9 PW1.0 S1.0 USB1.2 USB1.3 USB1.4

## Keep-outs
Keep-Out Layer:
  lines w10: 3700,4995 3940,4995 5285,4995 cw(c5292.5,4822.5) 5465,4830 ccw(c5520,4830) 5520,4775 ; 3705,4995 ccw(c3702.5,4932.5) 3640,4935 3640,4855 ccw(c3702.5,4852.5) 3700,4790 3800,4790 cw(c3797.5,4727.5) 3860,4725 3860,3985 cw(c3797.5,3982.5) 3800,3920 3700,3920 ccw(c3702.5,3857.5) 3640,3855 3640,3775 ccw(c3702.5,3777.5) 3705,3715 3935,3715 ; 3925,3715 5280,3715 ; 5270,3715 5280,3715 ; 5525,4775 5685,4775 cw(c5685,4710) 5750,4710 5750,4125 cw(c5685,4125) 5685,4060 5520,4060 ccw(c5520,4005) 5465,4005 5465,3900 cw(c5280,3900) 5280,3715

## Silkscreen, mask and mechanical layers (free items; w line width, h text height)
Top Overlay:
  text "-" at 4175,4915 h60
  text "3V3" at 4895,4745 h30
  text "GND" at 5400,4745 h30
  text "+" at 4175,4655 h60
  text "-" at 4145,4565 h60
  text "+" at 4145,4470 h60
Bottom Overlay:
  text "-" at 4145,4565 h60
  text "+" at 4145,4470 h60

## Text inside footprints (layer, text, board x,y; h text height)
NRF1: Top Overlay "CE" at 4900.21,4498.83 h30; Top Overlay "3V3" at 4900.21,4598.42 h30; Top Overlay "CSN" at 4900.21,4448.83 h30; Top Overlay "SCK" at 4900.21,4398.83 h30; Top Overlay "SDI" at 4900.21,4348.83 h30; Top Overlay "SDO" at 4900.21,4298.83 h30; Top Overlay "IRQ" at 4900.21,4248.83 h30; Top Overlay "GND" at 4900.21,4548.91 h30